# Altium PCB Adaptor PCB.PcbDoc
Units mil, origin at the board's own origin, x right, y up, seen from the top; angles counter-clockwise.
Board outline 1866.93 x 2099.61 mil, 2 copper layers (Top, Bottom); 6 components, 5 nets, 21 pads, 0 vias.
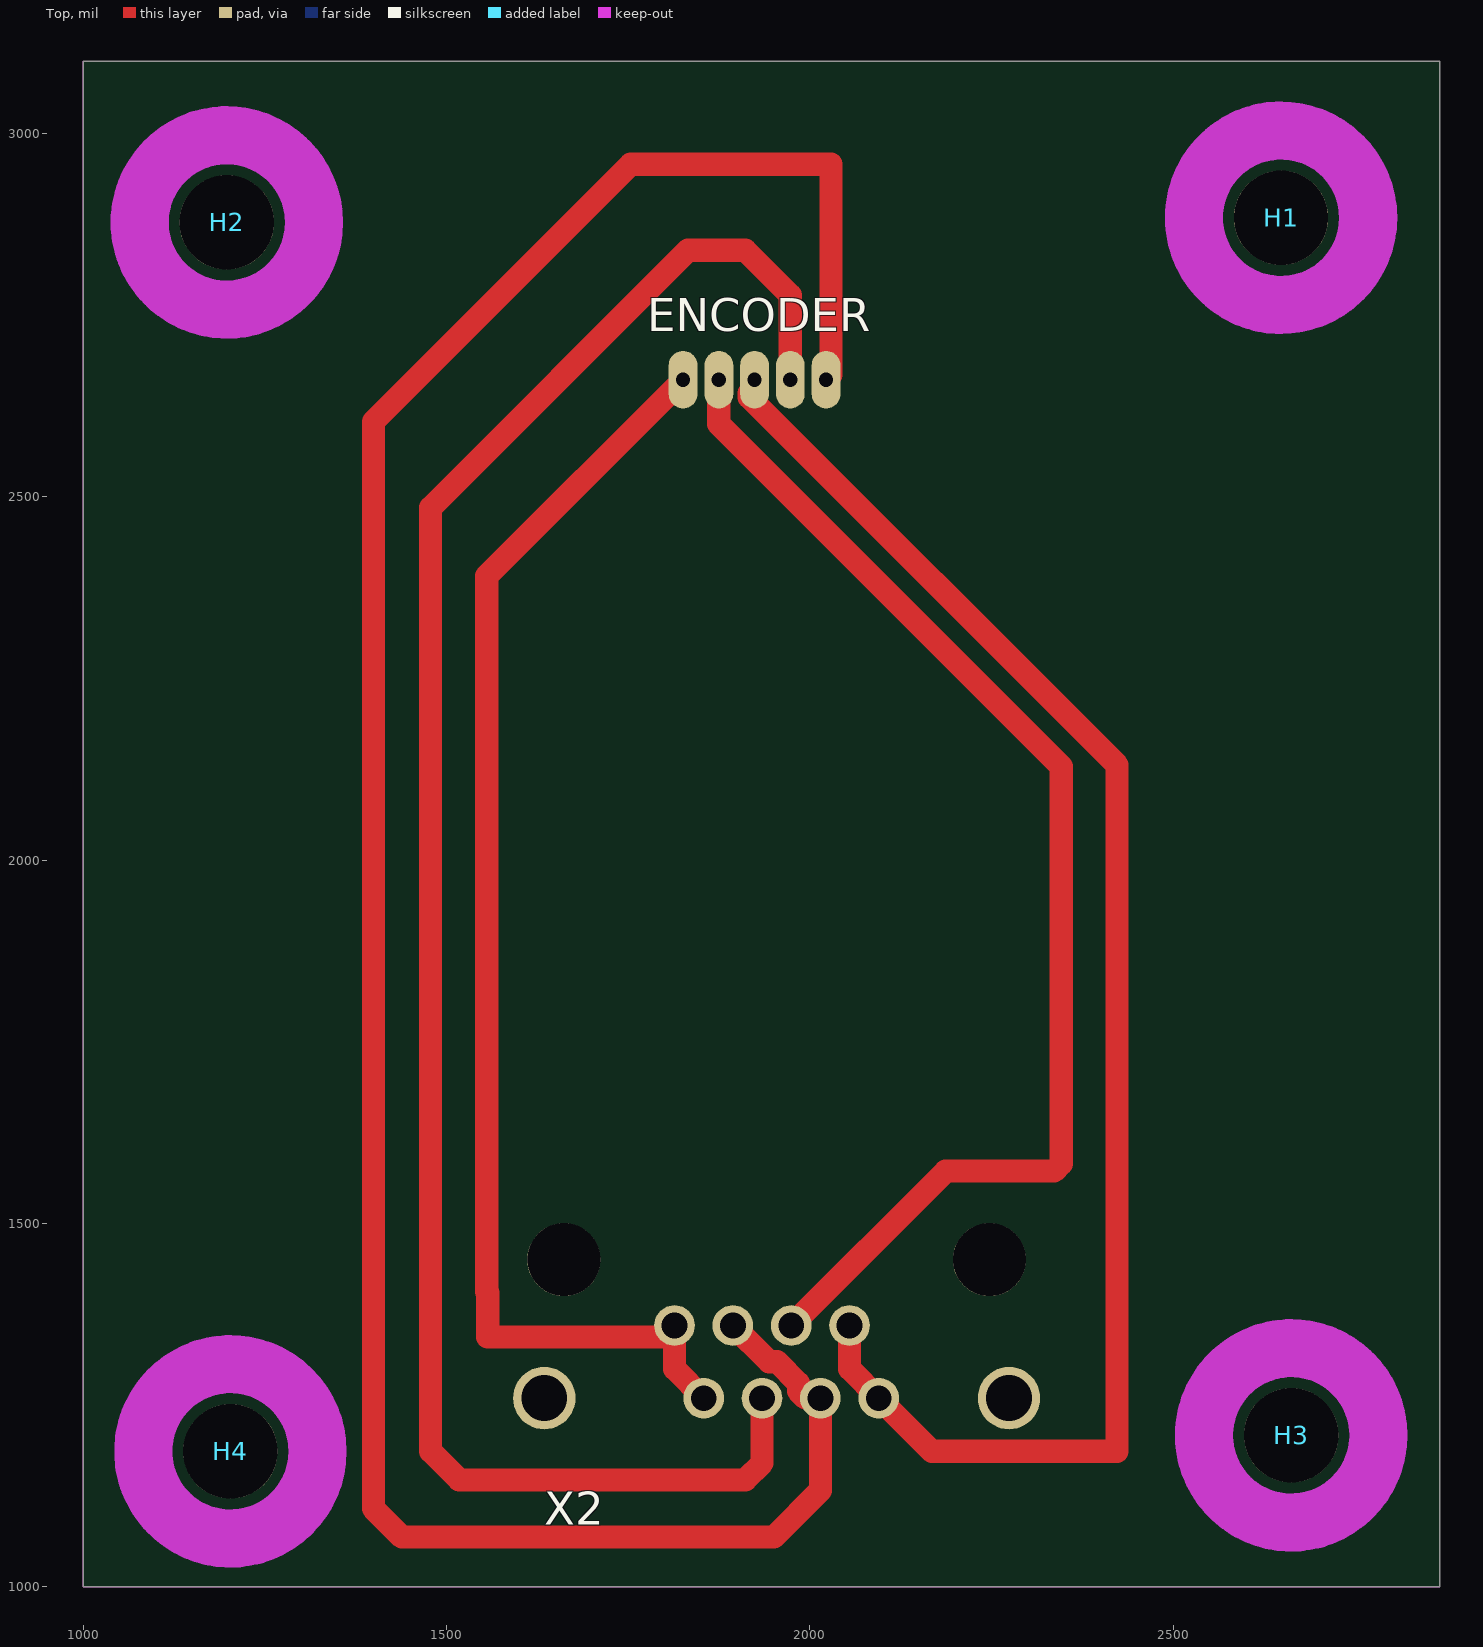
[diagram p0: Top view]
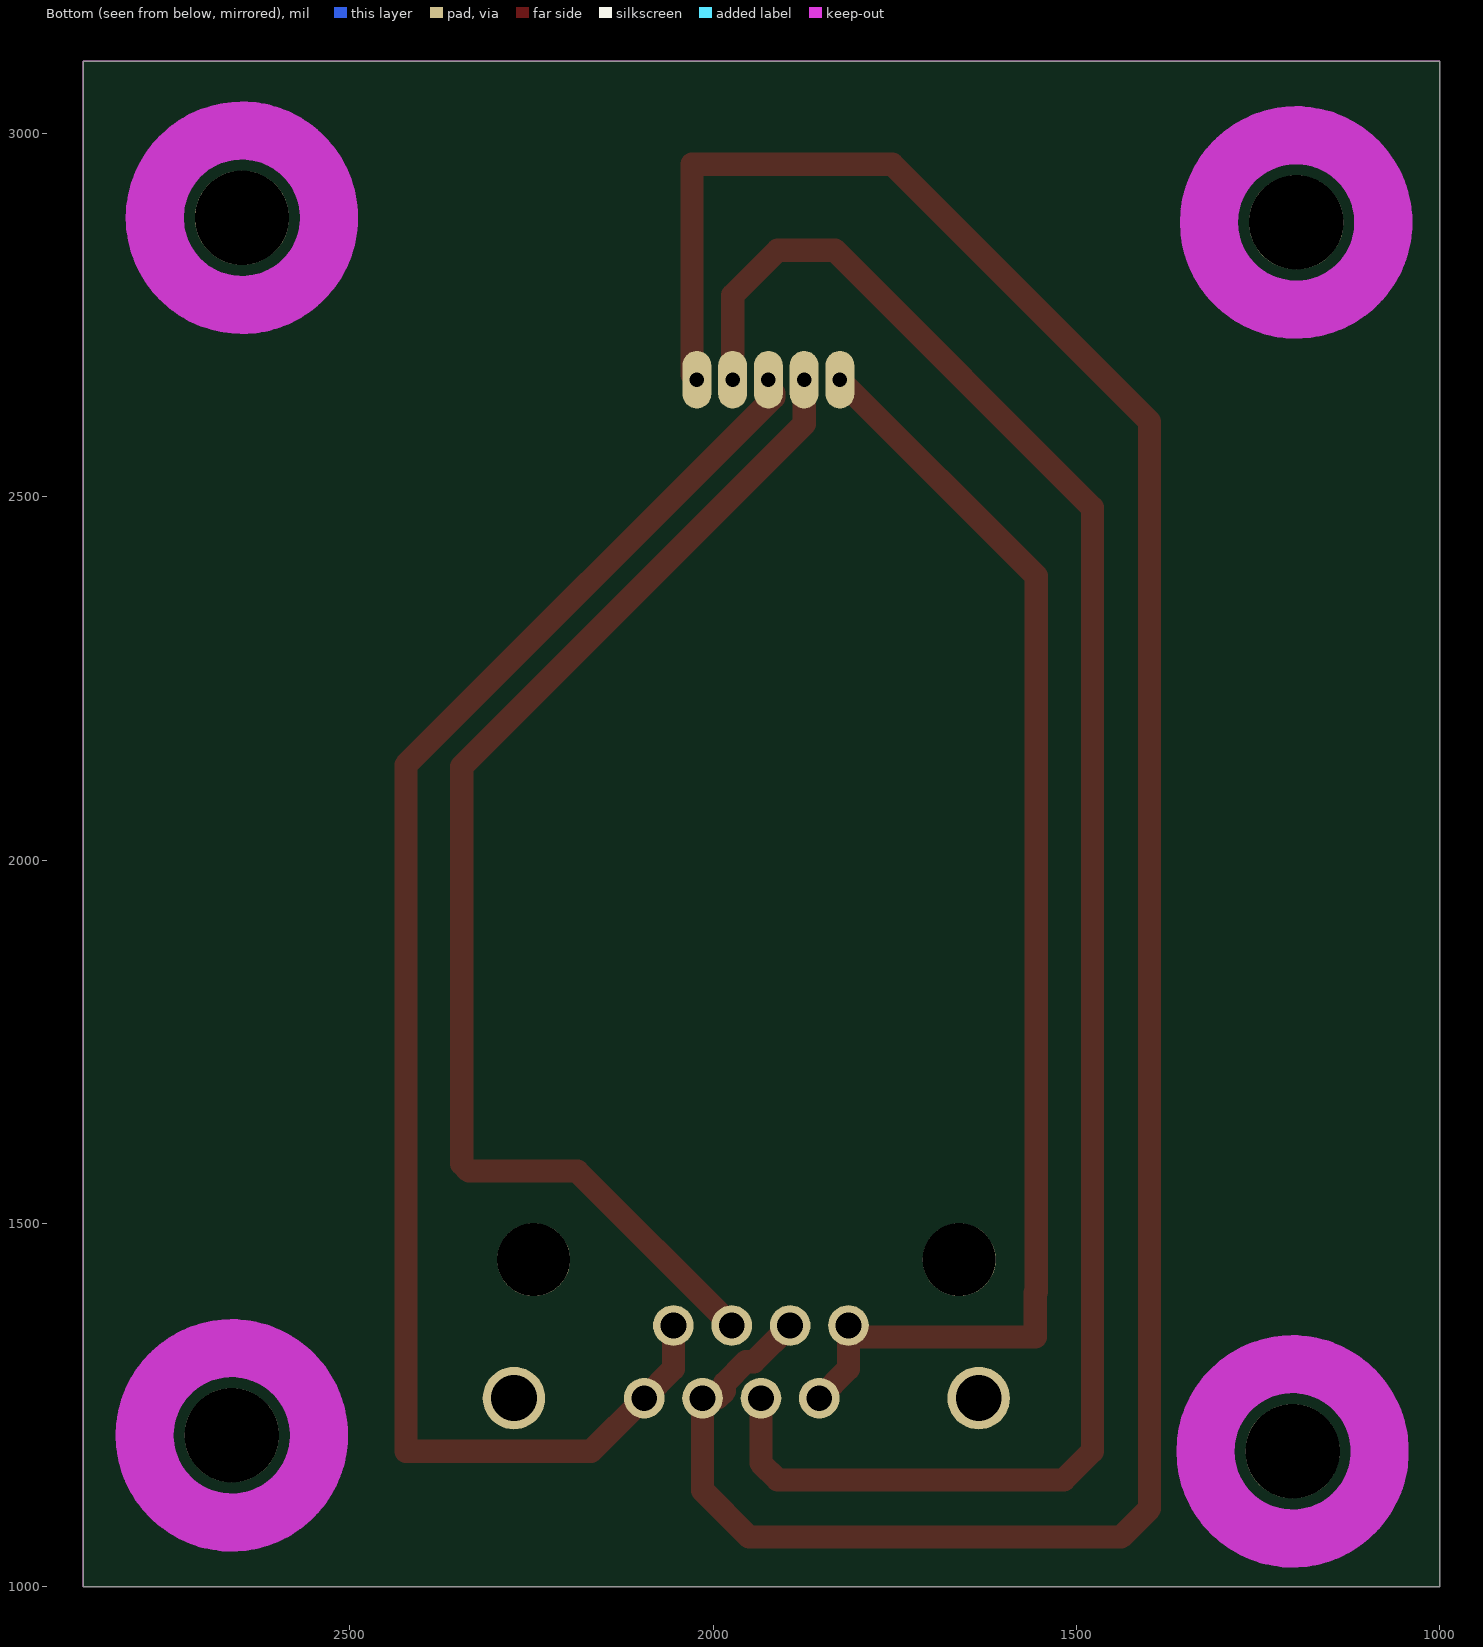
[diagram p1: Bottom view, seen from below]

## Layer stack, top to bottom
Top Solder: solder mask 0.4, Solder Resist, Dk 3.5
Top: signal copper 1.378
Dielectric 1: dielectric 12.6, FR-4, Dk 4.8
Bottom: signal copper 1.378
Bottom Solder: solder mask 0.4, Solder Resist, Dk 3.5

## Board outline
1000,1000 2866.93,1000 2866.93,3099.61 1000,3099.61

## Design rules (kind name [scope] priority, off if disabled: settings)
Clearance "Clearance (Same Net)" [All] p1: gap=6 ignorepadtopadclearanceinfootprint=FALSE
Clearance [All] p2: gap=6 ignorepadtopadclearanceinfootprint=FALSE
HoleSize [All] p1: absolutevalues=TRUE maxlimit=100000 minlimit=13.78 maxpercent=80.000 minpercent=20.000
HoleToHoleClearance mdDrill [All] p1: gap=6 allowstackedmicrovias=TRUE
PasteMaskExpansion mlMinCreamFrame [All] p1: expansion=0
PolygonConnect ThermalVias [IsVia] p1: connectstyle=Direct reliefconductorwidth=10 reliefentries=4 polygonreliefangle="90 Angle" airgapwidth=10
PolygonConnect [All] p2: connectstyle=Relief reliefconductorwidth=10 reliefentries=4 polygonreliefangle="90 Angle" airgapwidth=10
RoutingVias [All] p1: holewidth=13.78 width=29.78 viastyle="Through Hole" minholewidth=13.78 minwidth=29.78 maxholewidth=100 maxwidth=100
SolderMaskExpansion mlMinStopFrame [All] p1: expansion=4
Width [All] p1: maxlimit=10000 minlimit=6 preferedwidth=6
27 further rules are at their usual default settings.

## Components (designator, comment, footprint, x,y, rotation, side; value= is the part's Value field where it differs from the comment)
ENCODER "53047-05" 53047-05 1923.96,2643.78 r0 top
H1 "" 3,3 2648.68,2884.37 r0 top
H2 "" 3,3 1197.39,2878 r0 top
H3 "" 3,3 2662.68,1208.23 r0 top
H4 "" 3,3 1202.36,1186.22 r0 top
X2 "GLX-S-88M" GLX-S-88M 1954.33,1450 r0 top

## Footprints (in the part's own frame and the unit in brackets; to place one, negate y for a bottom-side part, rotate by r counter-clockwise, add the part's x,y. Pads: shape width x height; smd on the part's side, far side on the other; paste and mask are expansions set on the pad)
3,3 [mil] "3,3"
  round 129.92 hole 129.92 unplated: 1(0,0)
  Top keep-out circle w80: c0,0 r120
  Top keep-out circle w80: c0,0 r120
  Bottom keep-out circle w80: c0,0 r120
53047-05 [mil] "53047-05"
  oval 39.69x79.38 / inner round 60 / far side oval 39.69x79.38 hole 19.69: 1(98.43,17.72) 2(49.21,17.72) 3(0,17.72) 4(-49.21,17.72) 5(-98.43,17.72)
GLX-S-88M [mil] "GLX-S-88M"
  round 100.39 hole 100.39 unplated: 1(-292.91,0) 1(292.91,0)
  round 56 / inner round 60 / far side round 56 hole 35.43: 1(-140.55,-90.55) 2(-100.39,-190.55) 3(-60.24,-90.55) 4(-20.08,-190.55) 5(20.08,-90.55) 6(60.24,-190.55) 7(100.39,-90.55) 8(140.55,-190.55)
  round 86 / inner round 60 / far side round 86 hole 62.99: S1(-319.88,-190.55) S2(319.88,-190.55)

## Part data
H1 H2 H3 H4: library part 3,3, PackageName=3,3
ENCODER: PackageName=53047-05
X2: PackageName=GLX-S-88M

## Nets (pads, with @x,y where several pads share a name; then routed paths per layer and width w, separated by ;. In a path a pad name is that pad's centre, name@x,y a point inside that pad or via, vN(x,y) a via of type N, cw(c..) or ccw(c..) an arc to the next point about the centre after c; other vN are vias at no path point)
CLK: ENCODER.4 X2.5 | length 1738.8
  Top w32: ENCODER.4 1874.75,2600.45 2346.24,2128.96 2346.24,1582.06 2336.13,1571.95 2186.91,1571.95 X2.5
CS: ENCODER.2 X2.4 | length 2654.7
  Top w32: X2.4 1934.25,1170.08 1911.02,1146.85 1517.32,1146.85 1477.95,1186.22 1477.95,2485.43 1832.28,2839.76 1911.02,2839.76 1973.17,2777.61 ENCODER.2
DO: ENCODER.5 X2.1@1813.78,1359.45 X2.2 | length 1810.6
  Top w32: ENCODER.5 1555.22,2391.18 1555.22,1406.01 1556.69,1404.54 1556.69,1343.7 1798.03,1343.7 1813.78,1359.45 1813.78,1299.61 X2.2
GND: ENCODER.3 X2.7 X2.8 | length 2162.9
  Top w32: ENCODER.3 1923.96,2650.28 1916.59,2642.91 1916.59,2637.35 2422.83,2131.1 2422.83,1186.22 2168.11,1186.22 X2.8 2054.72,1299.61 X2.7
VDD: ENCODER.1 X2.3 X2.6 | length 3525.6
  Top w32: X2.3 1944.09,1309.45 1954.96,1309.45 1984.25,1280.16 1984.25,1269.29 1994.09,1259.45 X2.6 2014.57,1132.28 1950.39,1068.11 1438.58,1068.11 1399.21,1107.48 1399.21,2603.54 1753.54,2957.87 2029.13,2957.87 2029.13,2668.24 ENCODER.1
pads on no net: H1.1 H2.1 H3.1 H4.1 X2.1@1661.42,1450 X2.1@2247.24,1450 X2.S1 X2.S2

## Keep-outs
Keep-Out Layer:
  the board outline again, w0

## Silkscreen, mask and mechanical layers (free items; w line width, h text height)
Dimension:
  the board outline again, w0